# EAGLE board Prototype_Board (EAGLE 7.1.0)
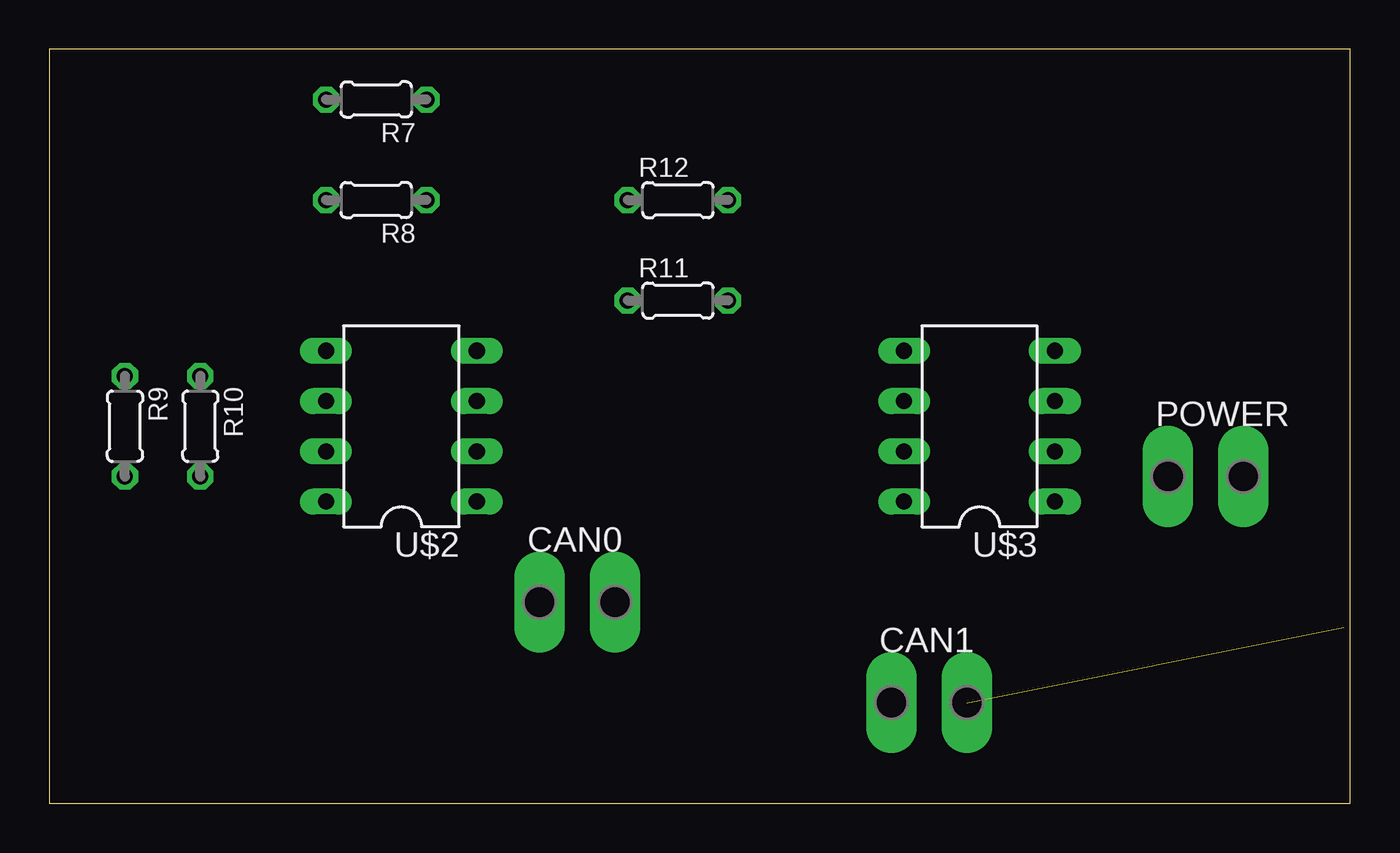
[diagram p0: board, top side]
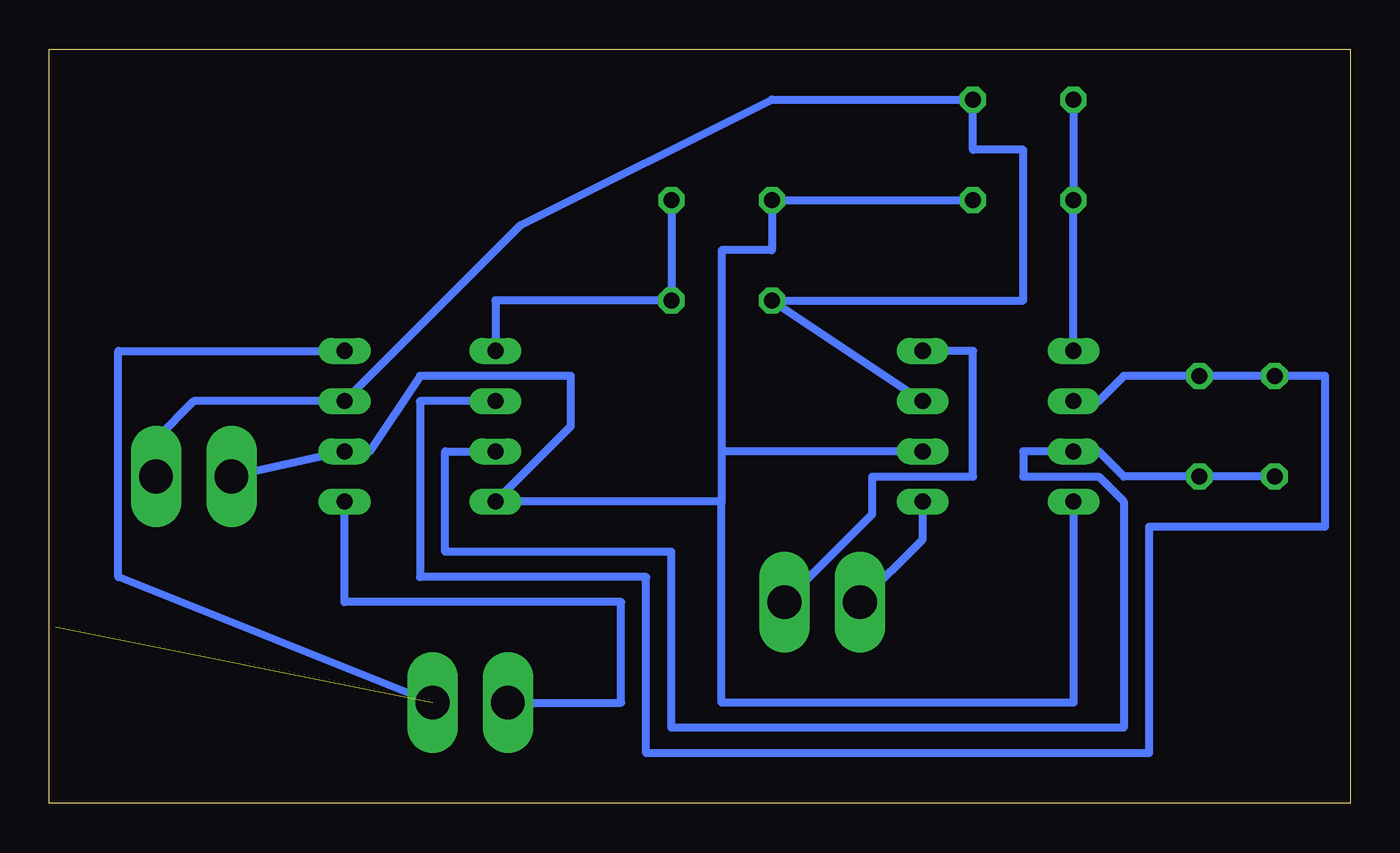
[diagram p1: board, bottom side, seen from below]

Size 65.71 x 38.09 mm. Coordinates in mm from the lower left corner, seen from the top.
Outline: 0,0 65.71,0 65.71,38.09 0,38.09 0,0
Copper layers (1*16): Top 0.035mm / dielectric 1.5mm / Bottom 0.035mm
Design rules "default": minimum track width 10mil, minimum drill 24mil, track to track 8mil, track to pad 8mil, pad to pad 8mil, via to via 8mil, smd to smd 8mil, copper to edge 40mil, drill to drill 8mil, minimum pad ring 10mil, minimum via ring 8mil, stop-mask expansion 4mil, vias tented up to drill 0mil, thermal gap 10mil

## Footprints (pad centres in the part's own frame; a part is rotated, then mirrored left to right if it is on the bottom)
P2-38-17 = drill 1.702 pad 2.121 long: TP-1 -1.905,0; TP-2 1.905,0
0204/5 = drill 0.813 octagon: 1 -2.54,0; 2 2.54,0
DIL08 = drill 0.813 long: 1 -3.81,-3.81; 2 -1.27,-3.81; 3 1.27,-3.81; 4 3.81,-3.81; 5 3.81,3.81; 6 1.27,3.81; 7 -1.27,3.81; 8 -3.81,3.81

## Placement (x,y rotation side)
CAN0  PTR2  [P2-38-17]  26.67,10.16 0 top
CAN1  PTR2  [P2-38-17]  44.45,5.08 0 top
POWER  PTR2  [P2-38-17]  58.42,16.51 0 top
R7  [0204/5]  16.51,35.56 180 top
R8  [0204/5]  16.51,30.48 180 top
R9  [0204/5]  3.81,19.05 270 top
R10  [0204/5]  7.62,19.05 270 top
R11  [0204/5]  31.75,25.4 0 top
R12  [0204/5]  31.75,30.48 0 top
U$2  MCP2551-DIP  [DIL08]  17.78,19.05 90 top
U$3  MCP2551-DIP  [DIL08]  46.99,19.05 90 top

## Library data of the parts
CAN0 CAN1 POWER = testpad
R7-R12 = resistor
U$2 U$3 = Dash parts

## Nets
GND: POWER.TP-1 R8.1 R12.1 U$2.2 U$2.8 U$3.2 U$3.8
N$3: R7.2 R8.2 U$2.5
N$4: R9.2 R10.2 U$2.7 U$3.7
N$7: R11.2 R12.2 U$3.5
N$8: R9.1 R10.1 U$2.6 U$3.6
RX1: CAN0.TP-2 U$2.4
RX2: CAN1.TP-2 U$3.4
TX1: CAN0.TP-1 U$2.1
TX2: CAN1.TP-1 U$3.1
VCC: POWER.TP-2 R7.1 R11.1 U$2.3 U$3.3

## Tracks (layer width: path | path; a pad name or v marks a point on that pad's centre or on a via)
GND
  Bottom 0.406: U$2.8 13.97,5.08 31.75,5.08 31.75,15.24 | 31.75,15.24 U$3.8 39.37,19.05 39.37,21.59 46.99,21.59 49.53,17.78 U$3.2 POWER.TP-1 | U$2.2 31.75,17.78 | 31.75,17.78 31.75,15.24 | R8.1 R12.1 29.21,27.94 31.75,27.94 31.75,17.78
N$3
  Bottom 0.406: U$2.5 R8.2 R7.2
N$4
  Bottom 0.406: R9.2 R10.2 11.43,16.51 12.7,17.78 U$2.7 16.51,17.78 16.51,16.51 12.7,16.51 11.43,15.24 11.43,3.81 34.29,3.81 34.29,12.7 45.72,12.7 45.72,17.78 U$3.7
N$7
  Bottom 0.406: U$3.5 43.18,25.4 R11.2 R12.2
N$8
  Bottom 0.406: U$2.6 12.7,20.32 11.43,21.59 R10.1 R9.1 1.27,21.59 1.27,13.97 10.16,13.97 10.16,2.54 35.56,2.54 35.56,11.43 46.99,11.43 46.99,20.32 U$3.6
RX1
  Bottom 0.406: CAN0.TP-2 24.13,14.61 24.13,16.51 19.05,16.51 19.05,22.86 U$2.4
RX2  (1 unrouted)
  Bottom 0.406: CAN1.TP-2 62.23,11.43 62.23,22.86 U$3.4
TX1
  Bottom 0.406: CAN0.TP-1 21.59,13.34 U$2.1
TX2
  Bottom 0.406: CAN1.TP-1 36.83,5.08 36.83,10.16 50.8,10.16 U$3.1
VCC
  Bottom 0.406: U$2.3 R11.1 16.51,25.4 16.51,33.02 19.05,33.02 R7.1 29.21,35.56 41.91,29.21 U$3.3 58.42,20.32 60.33,18.41 POWER.TP-2